# Altium PCB Motor_Mod_v1.0.PcbDoc
Units mm, origin at the board's own origin, x right, y up, seen from the top; angles counter-clockwise.
Board outline 23.2 x 30.3 mm, 2 copper layers (Top Layer, Bottom Layer), stack 1.569 mm thick; 4 components, 9 nets, 28 pads, 4 vias.
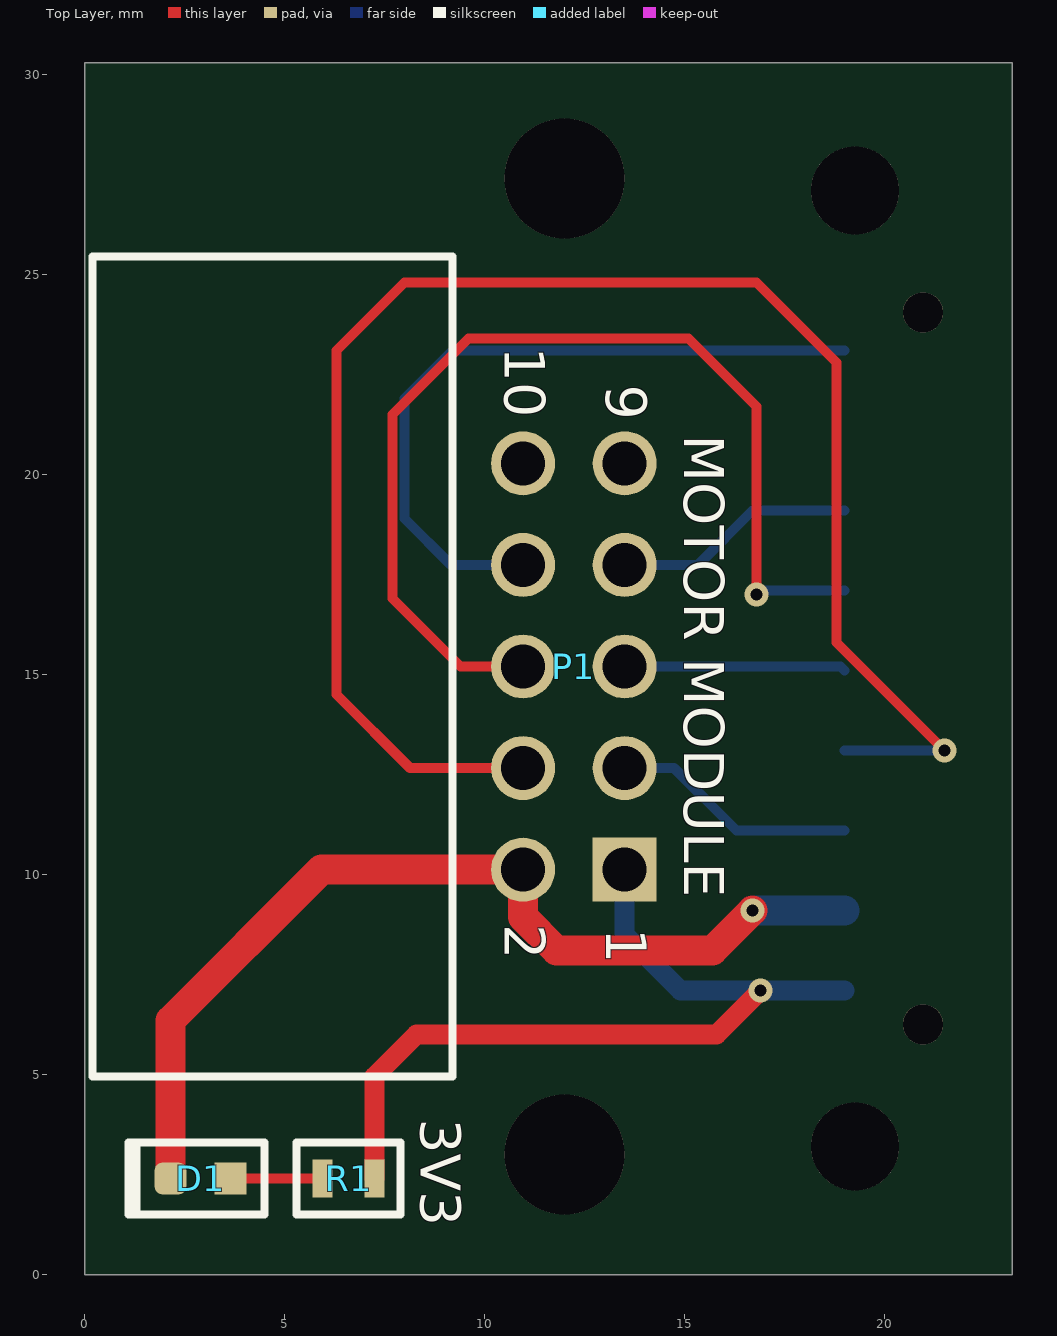
[diagram p0: Top Layer view]
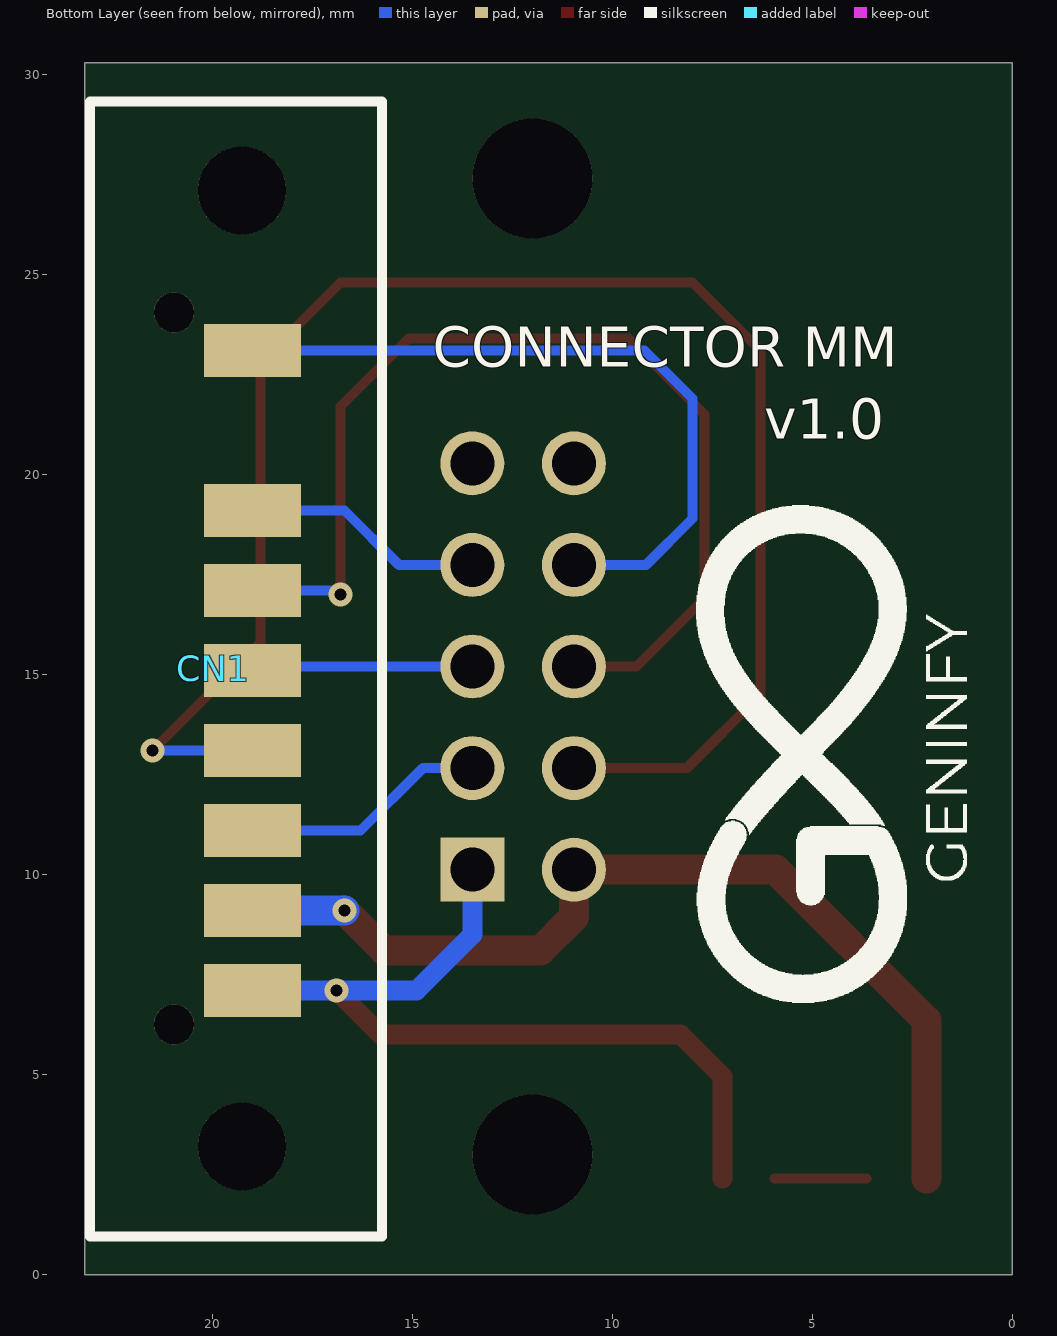
[diagram p1: Bottom Layer view, seen from below]
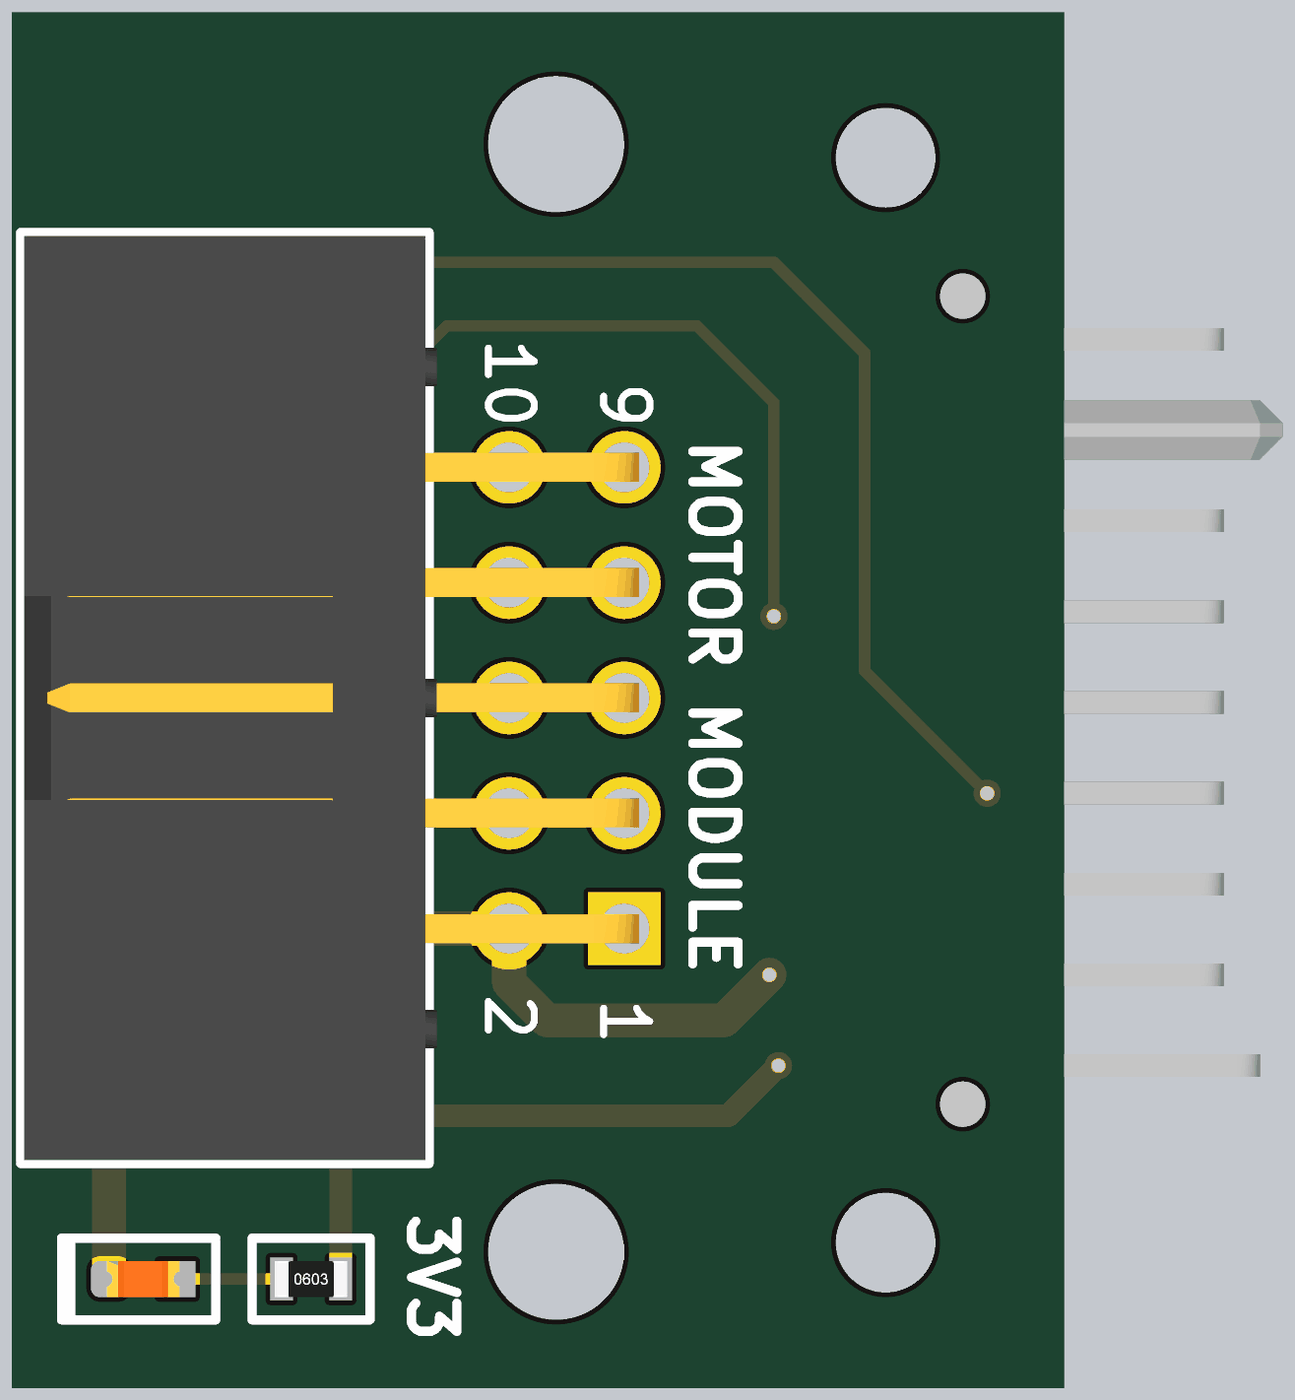
[diagram p2: 3D render of the assembled board from above, using the file's embedded part models]

## Layer stack, top to bottom
Top Solder: solder mask 0.0254, SM-001, Dk 4
Top Layer: signal copper 0.035
Dielectric 1: core 1.4986, Core-043, Dk 4.3
Bottom Layer: signal copper 0.035
Bottom Solder: solder mask 0.0254, SM-001, Dk 4

## Board outline
0,0 23.2,0 23.2,30.3 0,30.3

## Design rules (kind name [scope] priority, off if disabled: settings)
Clearance [All] p1: gap=0.254 ignorepadtopadclearanceinfootprint=FALSE except(0: Arc-Hole Track-Hole SMDPad-Hole THPad-Hole Via-Hole Fill-Hole Poly-Hole Region-Hole Text-Hole)
HoleSize [All] p1: absolutevalues=TRUE maxlimit=4 minlimit=0.025 maxpercent=80.000 minpercent=20.000
PolygonConnect [All] p1: connectstyle=Relief reliefconductorwidth=0.254 reliefentries=4 polygonreliefangle="90 Angle" airgapwidth=0.254
RoutingVias [All] p1: holewidth=0.711 width=1.27 viastyle="Through Hole" minholewidth=0.711 minwidth=1.27 maxholewidth=0.711 maxwidth=1.27
SolderMaskExpansion [All] p1: expansion=0.102 istentingtop=FALSE
Width [All] p1: maxlimit=1 minlimit=0.254 preferedwidth=0.254
29 further rules are at their usual default settings.

## Components (designator, comment, footprint, x,y, rotation, side; value= is the part's Value field where it differs from the comment)
CN1 "Battery CONN" 1747785-1 20.962,24.052 r270 bottom
D1 "LED - Orange" LED0603-Orange 2.9,2.4 r0 top
P1 "61201021721" 61201021721 4.7,15.2 r270 top
R1 "68R" "68R 0603" 6.6,2.4 r0 top

## Footprints (in the part's own frame and the unit in brackets; to place one, negate y for a bottom-side part, rotate by r counter-clockwise, add the part's x,y. Pads: shape width x height; smd on the part's side, far side on the other; paste and mask are expansions set on the pad)
"68R 0603" [mm]
  rect 0.5x0.95 smd: 1(-0.65,0) 2(0.65,0)
  silkscreen extent -1.3,-0.9 1.3,0.9, body extent -0.8,-0.4 0.8,0.4, height 0.45
1747785-1 [mm]
  rect 1.33x2.43 smd: 1(0.951,1.962) 2(4.951,1.962) 3(6.951,1.962) 4(8.952,1.962) 5(10.952,1.962) 6(12.952,1.962) 7(14.952,1.962) 8(16.952,1.962)
  round 2.2 hole 2.2 unplated: ""(-3.05,1.7) ""(20.85,1.7)
  round 1 hole 1 unplated: ""(0,0) ""(17.8,0)
  Top Layer lines w0.254: 20.838,1.712 20.826,1.7
  silkscreen extent -5.27,-2.1 23.1,5.2, body extent -5.1,-7.05 23,5, height 4.71
61201021721 [mm] "10 pins, right angled, gold plating"
  rect 1.6x1.6 hole 1.1: 1(5.08,8.805)
  round 1.6 hole 1.1: 2(5.08,6.265) 3(2.54,8.805) 4(2.54,6.265) 5(0,8.805) 6(0,6.265) 7(-2.54,8.805) 8(-2.54,6.265) 9(-5.08,8.805) 10(-5.08,6.265)
  silkscreen extent -10.26,-4.5 10.26,4.5, body extent -10.18,-4.42 10.18,9.13, height 9.23
LED0603-Orange [mm]
  rrect50% 0.8x0.8 smd: 1(-0.75,0)
  rect 0.8x0.8 smd: 2(0.75,0)
  silkscreen extent -1.8,-0.9 1.6,1, body extent -0.8,-0.4 0.8,0.4, height 0.7

## Part data
CN1: library part 1747785-1
D1: library part LTST-C191KFKT, "LED ORANGE CLEAR SMD", Case Code (Imperial)=0603, Case Code (Metric)=1608, Color=Orange, Forward Current=30mA, Forward Voltage=2V, Lens Color=Colorless, Manufacturer="Vishay Lite-On", Max Operating Temperature=85°C, Min Operating Temperature=-55°C, Package Quantity=1, Power Dissipation=75mW, Reverse Voltage=5V, Supplier Part Number 1=160-1445-1-ND, Test Current=20mA, Case/Package=0603, Category=LEDs, ComponentLink1Description=https://datasheet.ciiva.com/2109/ltst-c191kfkt-2109968.pdf?src-supplier=Digi-Key, ComponentLink1URL=https://datasheet.ciiva.com/2109/ltst-c191kfkt-2109968.pdf?src-supplier=Digi-Key, ComponentLink2Description=https://datasheet.ciiva.com/12400/100-ltst-c191kfkt-39904-12400811.pdf?src-supplier=Mouser, ComponentLink2URL=https://datasheet.ciiva.com/12400/100-ltst-c191kfkt-39904-12400811.pdf?src-supplier=Mouser, ComponentLink3Description=https://datasheet.ciiva.com/11775/0900766b80dc02b0-11775613.pdf?src-supplier=RSComponents, ComponentLink3URL=https://datasheet.ciiva.com/11775/0900766b80dc02b0-11775613.pdf?src-supplier=RSComponents, ComponentLink4Description=https://datasheet.ciiva.com/15201/getdatasheetpartid-631075-15201391.pdf?src-supplier=Verical, ComponentLink4URL=https://datasheet.ciiva.com/15201/getdatasheetpartid-631075-15201391.pdf?src-supplier=Verical, ComponentLink5Description=https://datasheet.ciiva.com/2109/s-110-ltst-c191kfkt-2109969.pdf?src-supplier=Digi-Key, ComponentLink5URL=https://datasheet.ciiva.com/2109/s-110-ltst-c191kfkt-2109969.pdf?src-supplier=Digi-Key, Depth=0.8mm, Dominant Wavelength=605nm, Height=0.55mm, Illumination Color=Orange, Lead Free="Lead Free", Length=1.6mm, Lens Style=Diffused,Colorless,Rectangular, Lens Transparency=Clear, Luminous Intensity=90mcd, Manufacturer Part Number=LTST-C191KFKT, Mount="Surface Mount", Number of Elements=1, Number of LEDs=1, Number of Pins=2, Packaging="Tape and Reel", Power Rating=75mW, Pricing 1="1=0.24000, 10=0.17900, 100=0.08460, 500=0.05640, 1000=0.04418, 2500=0.04324 (USD)", Radiation Hardening=No, RoHS=Yes, Stock 1=92562, Supplier 1=Digi-Key, Viewing Angle=130°, Wavelength=611nm, Width=0.8mm
P1: library part CMP-1502-00021-1, "Male Box Header WR-BHD, THT, Angled, pitch 2.54 mm, 10 pins", Contact Resistance=20mOhm, Manufacturer="Wurth Elektronik", Operating Temperature=-40to125degC, Withstanding Voltage=500VAC, Working Voltage=250VAC, Datasheet URL=https://katalog.we-online.de/em/datasheet/6120xx21721.pdf, Gender=Male, Manufacturer URL=http://www.we-online.de, Mounting Technology=THT, Orientation=Angled, Package Reference=61201021721, Packaging=Tray, Part Number=61201021721, Pin Number=10, Pitch=2.54mm, Published Date=August2018, Publisher=WurthElektronik
R1: library part CRGP0603F68R, "CRGP 0603 68R 1%", Case Code (Imperial)=0603, Case Code (Metric)=1608, Manufacturer="TE Connectivity", Max Operating Temperature=155°C, Max Power Dissipation=250mW, Min Operating Temperature=-55°C, Resistor Type="Thick Film", Supplier Part Number 1=A130402CT-ND, Temperature Coefficient=200ppm/°C, Tolerance=1%, Case/Package=0603, Category="Chip SMD Resistors", ComponentLink1Description=https://www.te.com/commerce/DocumentDelivery/DDEController?Action=srchrtrv&amp;DocNm=9-1773463-9&amp;DocType=DS&amp;DocLang=English&src-supplier=Digi-Key, ComponentLink1URL=https://www.te.com/commerce/DocumentDelivery/DDEController?Action=srchrtrv&amp;DocNm=9-1773463-9&amp;DocType=DS&amp;DocLang=English&src-supplier=Digi-Key, Manufacturer Part Number=CRGP0603F68R, Number of Terminations=2, Packaging="Tape and Reel", Pricing 1="1=0.14000, 10=0.11400, 100=0.04470, 1000=0.01870, 2500=0.01714 (USD)", Resistance=68R, RoHS=No, Stock 1=49308, Supplier 1=Digi-Key

## Free pads (board coordinates)
  round 3 hole 3 unplated: ""(12,3) ""(12,27.4)

## Via types
v1: diameter 0.6, hole 0.3, Top Layer to Bottom Layer, tented both sides, 4 vias

## Nets (pads, with @x,y where several pads share a name; then routed paths per layer and width w, separated by ;. In a path a pad name is that pad's centre, name@x,y a point inside that pad or via, vN(x,y) a via of type N, cw(c..) or ccw(c..) an arc to the next point about the centre after c; other vN are vias at no path point)
+3V3: CN1.8 P1.1 R1.2 | length 20.8
  Top Layer w0.5: R1.2 7.25,4.95 8.3,6 15.8,6 v1(16.9,7.1)
  Bottom Layer w0.254: P1.1@13.5,10.115 P1.1
  Bottom Layer w0.5: P1.1@13.5,10.115 13.5,8.5 14.9,7.1 CN1.8
DIR: CN1.6 P1.3 | length 6.1
  Bottom Layer w0.254: P1.3 14.74,12.66 16.3,11.1 CN1.6
FAN: CN1.1 P1.8 | length 17.9
  Bottom Layer w0.254: P1.8 9.16,17.74 8,18.9 8,21.9 9.2,23.1 CN1.1
GND: CN1.7 D1.1 P1.2 | length 24.3
  Top Layer w0.75: D1.1 2.15,6.35 5.92,10.12 P1.2 10.965,8.935 11.8,8.1 15.7,8.1 v1(16.7,9.1)
  Bottom Layer w0.75: v1(16.7,9.1) CN1.7
NetD1_2: D1.2 R1.1 | length 2.3
  Top Layer w0.254: D1.2 R1.1
PWM: CN1.5 P1.4 | length 41.4
  Top Layer w0.254: P1.4 8.14,12.66 6.3,14.5 6.3,23.1 8,24.8 16.8,24.8 18.8,22.8 18.8,15.8 v1(21.5,13.1)
  Bottom Layer w0.254: CN1.5 v1(21.5,13.1)
SIG_1: CN1.4 P1.5 | length 5.5
  Bottom Layer w0.254: P1.5 18.9,15.2 CN1.4
SIG_2: CN1.3 P1.6 | length 26.1
  Top Layer w0.254: P1.6 9.4,15.2 7.7,16.9 7.7,21.5 9.6,23.4 15.1,23.4 16.8,21.7 v1(16.8,17)
  Bottom Layer w0.254: v1(16.8,17) 16.894,17 16.994,17.1 CN1.3
TEMP: CN1.2 P1.7 | length 6.1
  Bottom Layer w0.254: P1.7 15.34,17.74 16.7,19.1 CN1.2
pads on no net: CN1. P1.9 P1.10

## Silkscreen, mask and mechanical layers (free items; w line width, h text height)
Top Overlay:
  text "MOTOR MODULE" at 15,21 h1 r270
  text "3V3" at 8.4,3.9 h1 r270
Bottom Overlay:
  drawing of 9 lines, arcs and shapes, not listed
  text "CONNECTOR MM" at 14.5,22.7 h1
  text "v1.0" at 6.2,20.9 h1

## Text inside footprints (layer, text, board x,y; h text height)
P1: Top Overlay "9" at 13.04,22.24 h1.02 r270; Top Overlay "10" at 10.5,23.2 h1.02 r270; Top Overlay "2" at 10.5,8.76 h1.02 r270; Top Overlay "1" at 13.04,8.66 h1.02 r270